# Altium PCB PCB2.PcbDoc
Units mil, origin at the board's own origin, x right, y up, seen from the top; angles counter-clockwise.
Board outline 6000 x 4000 mil, 4 copper layers (Top Layer, Layer 1, Layer 2, Bottom Layer), stack 23.756 mil thick; 26 components, 26 nets, 80 pads, 6 vias.
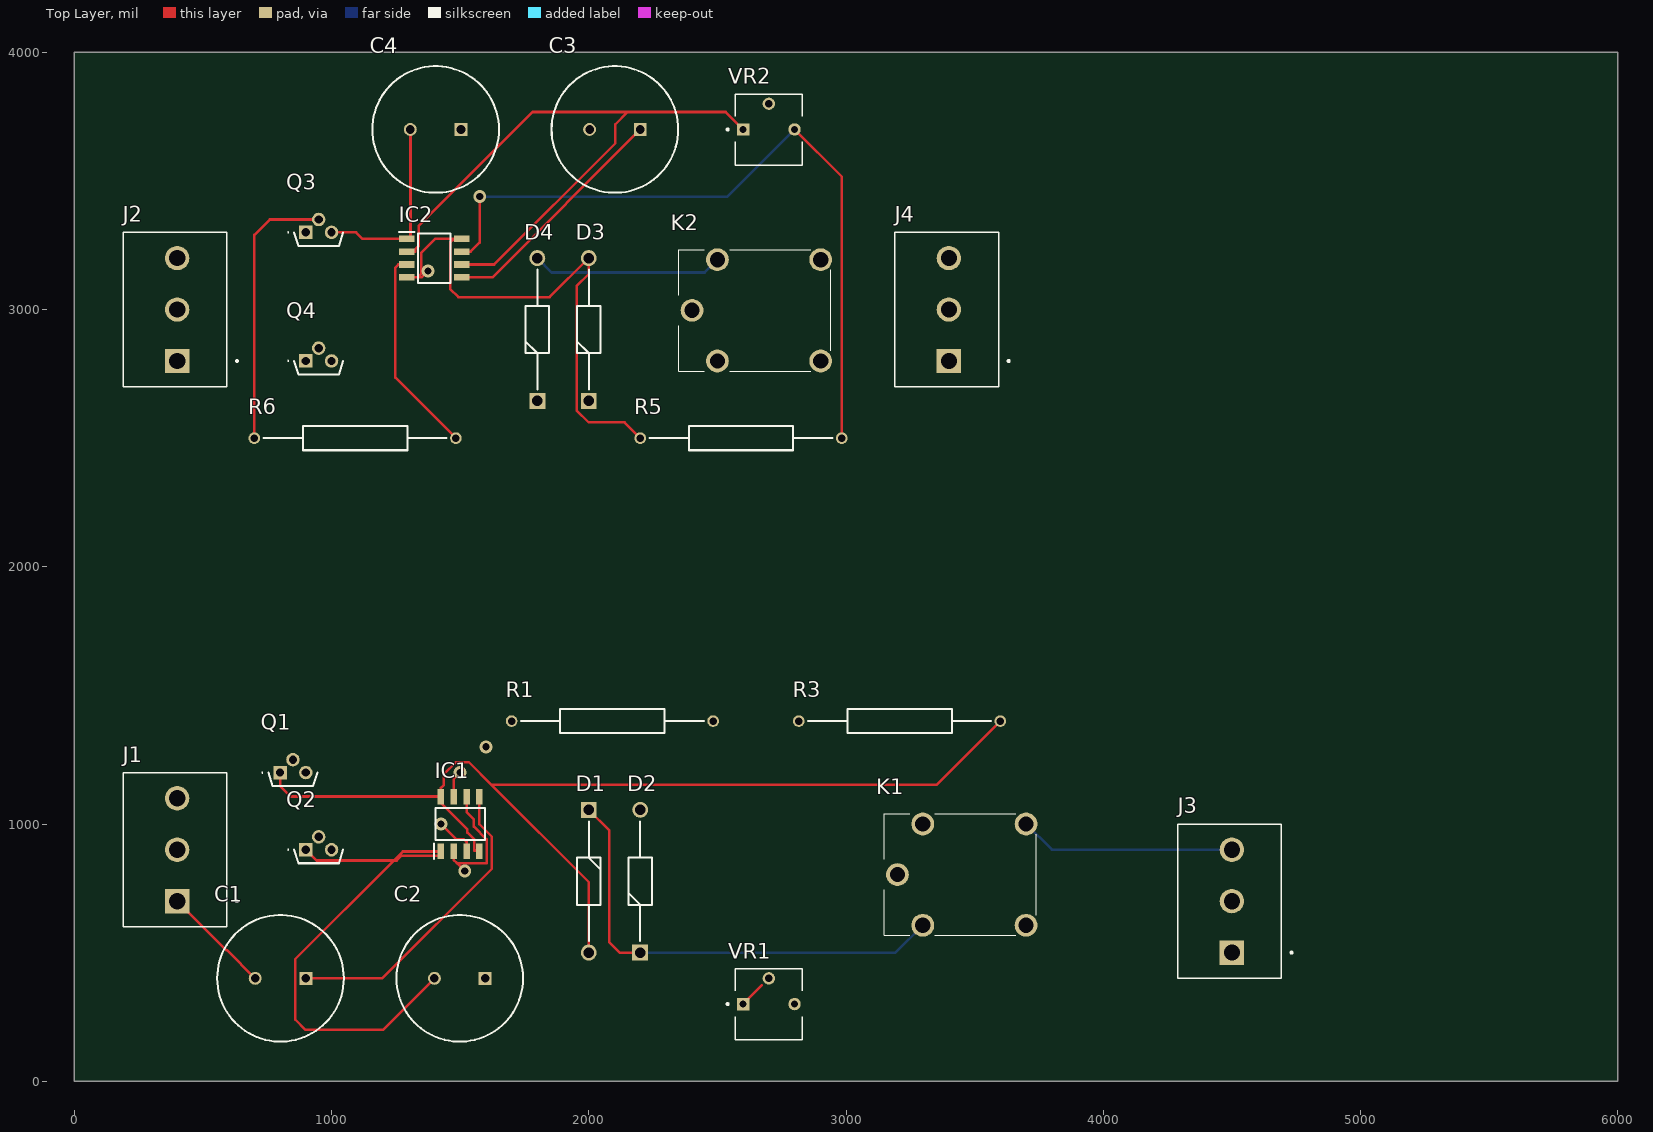
[diagram p0: Top Layer view]
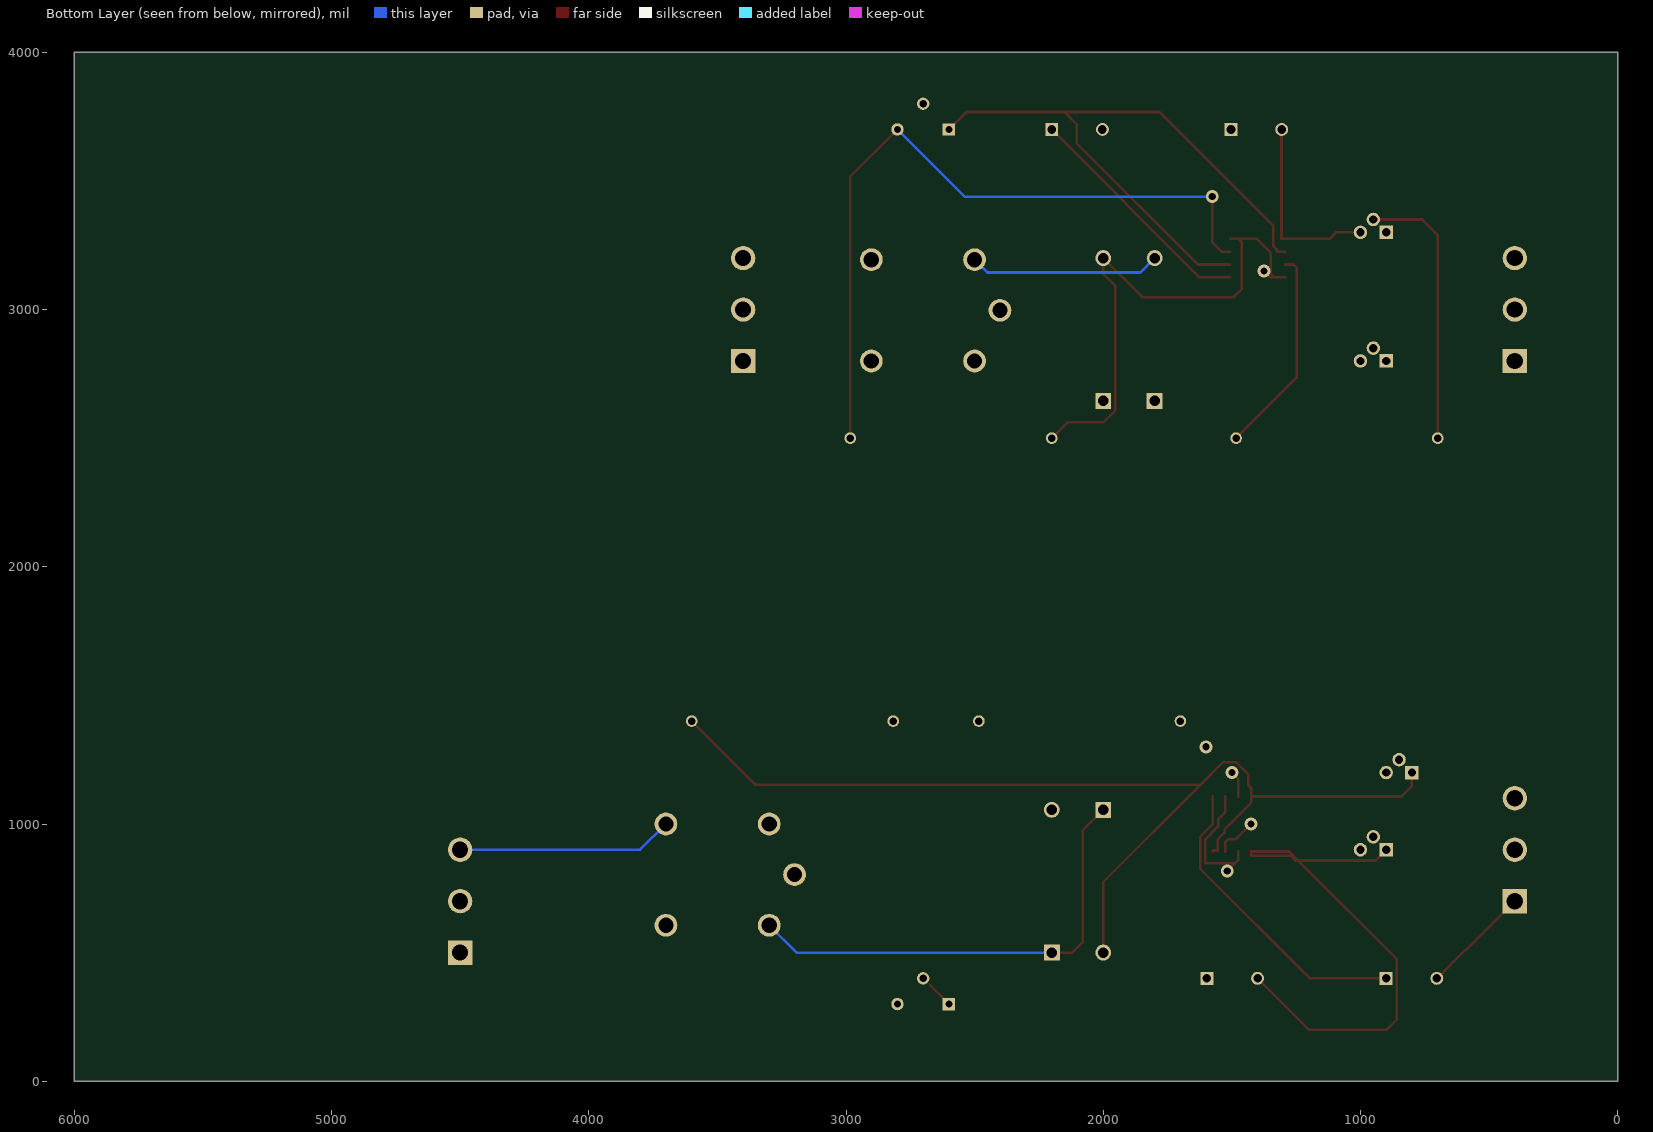
[diagram p1: Bottom Layer view, seen from below]
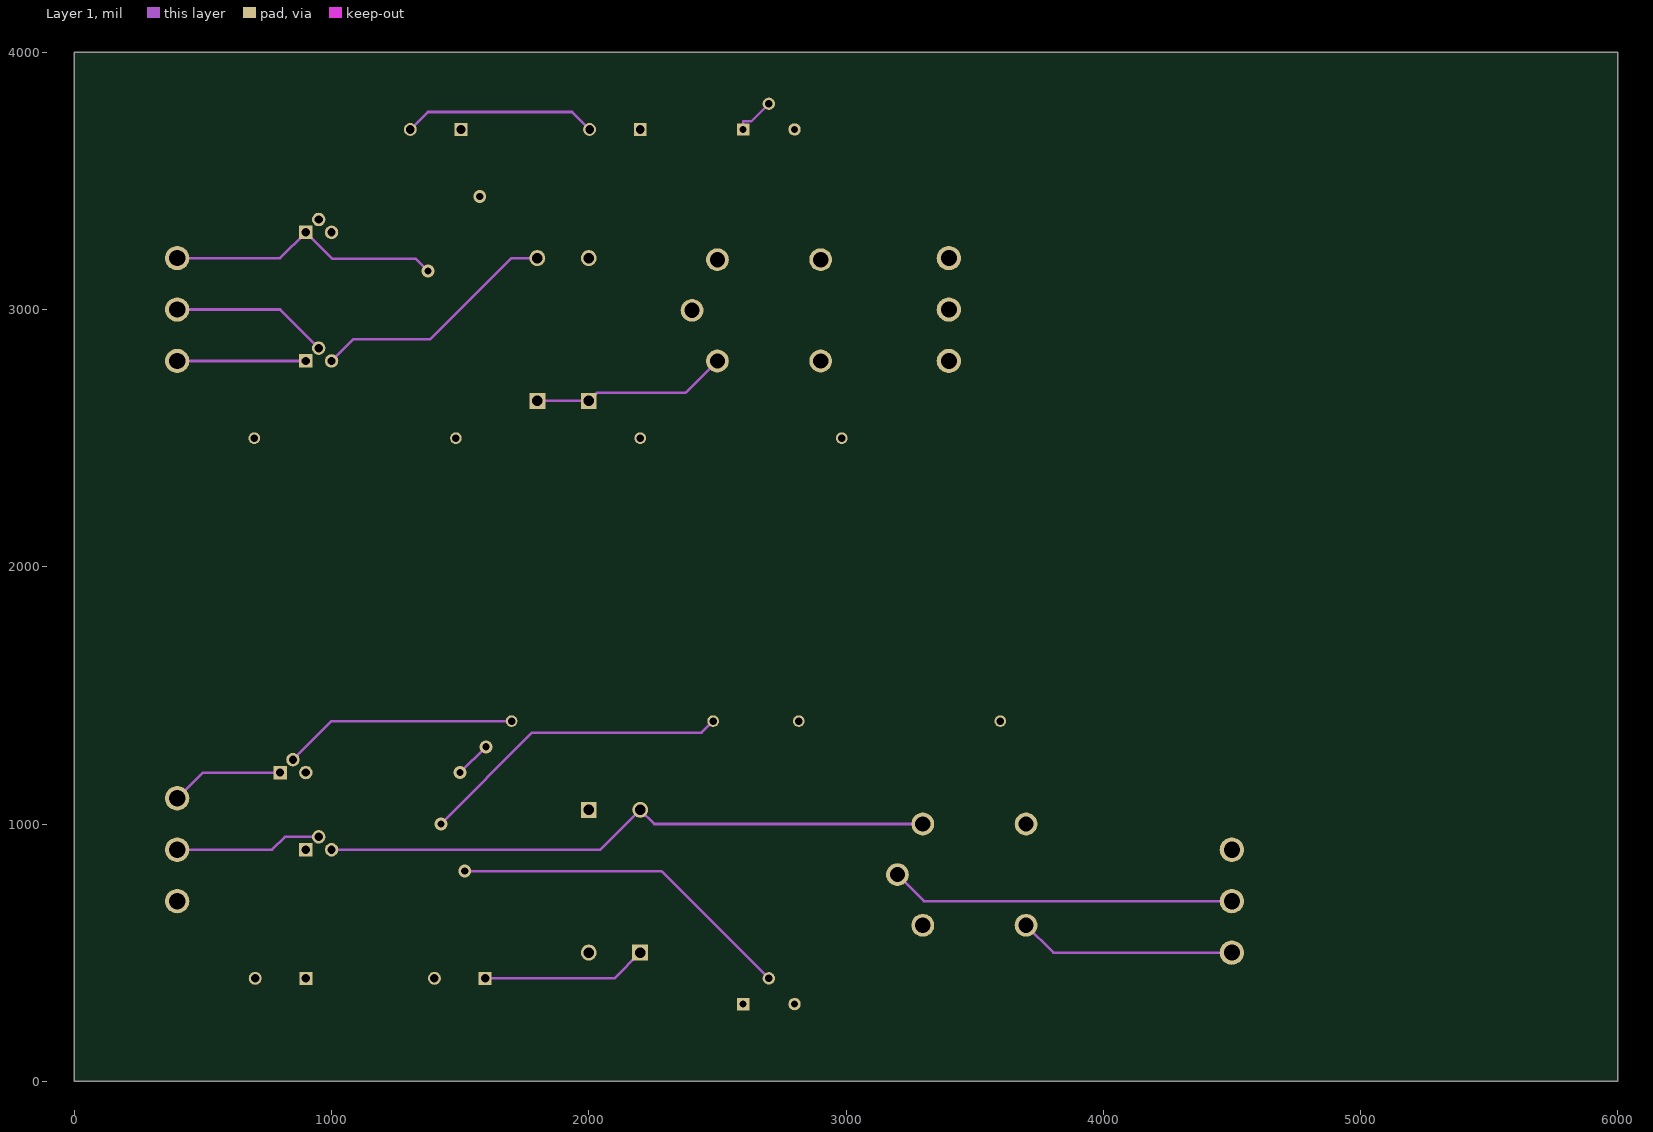
[diagram p2: Layer 1]
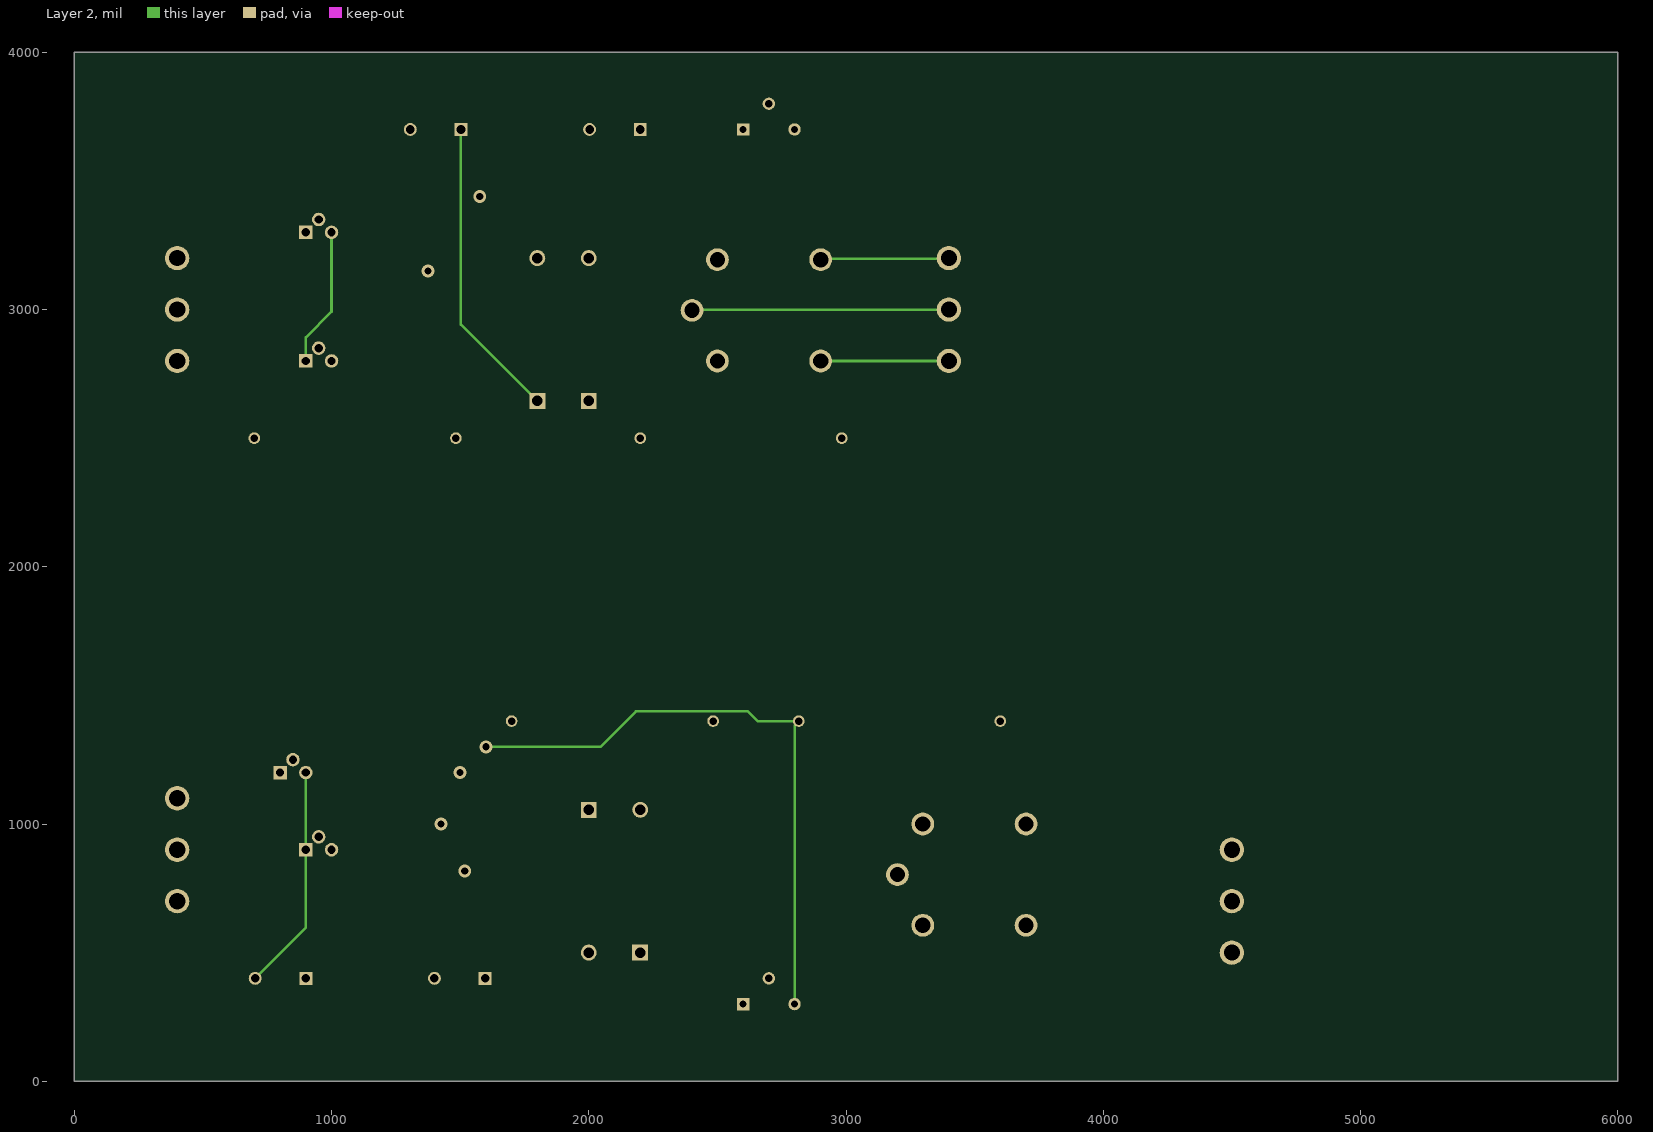
[diagram p3: Layer 2]
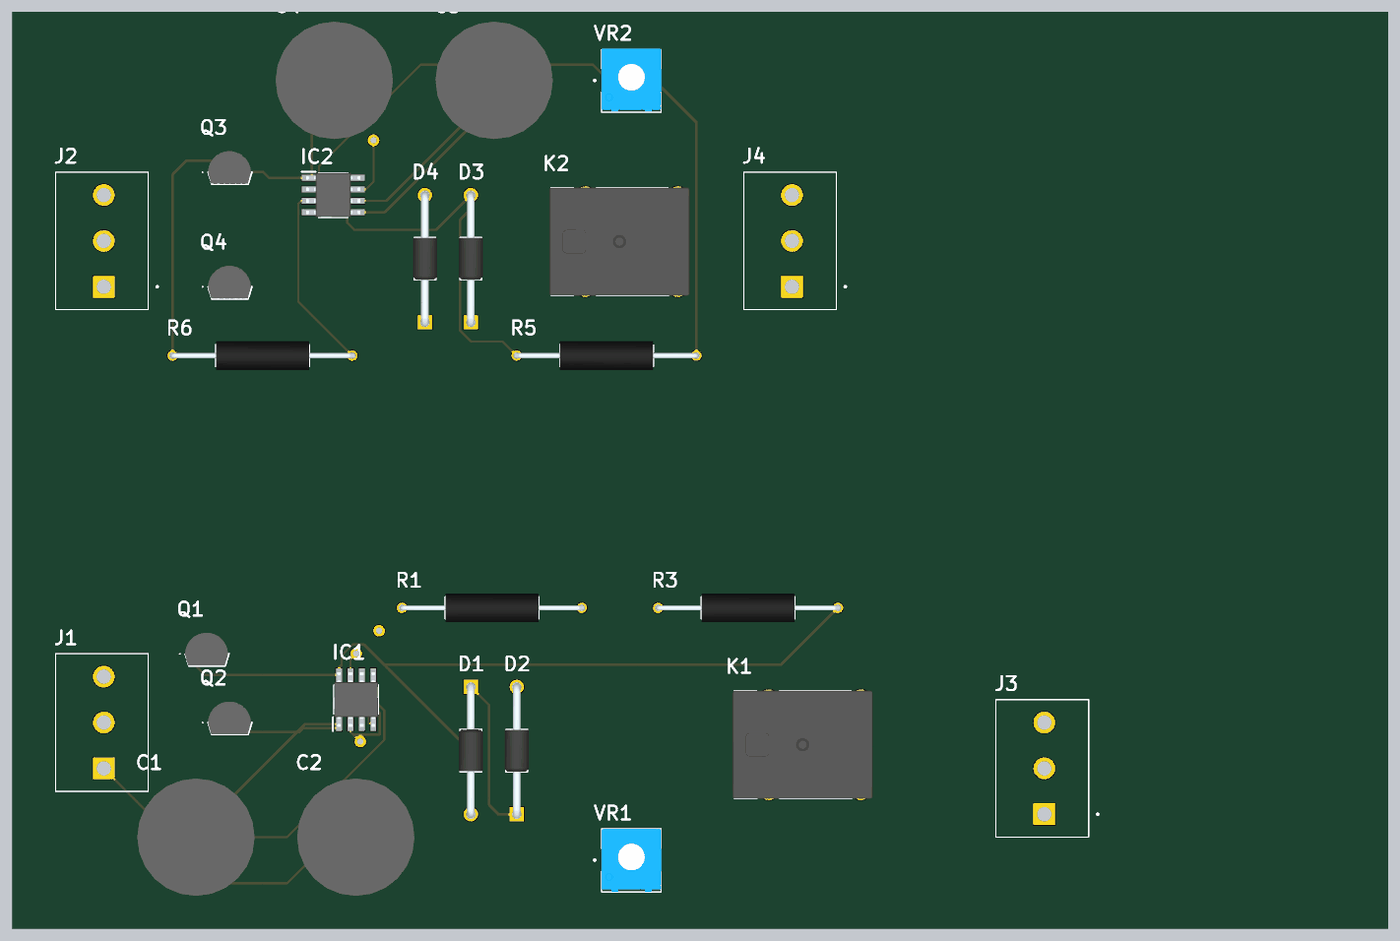
[diagram p4: 3D render of the assembled board from above, using the file's embedded part models]

## Layer stack, top to bottom
Top Solder: solder mask 0.4, Solder Resist, Dk 3.5
Top Layer: signal copper 1.4
Dielectric 2: prepreg 2.8, PP-006, Dk 4.1
Layer 1: signal copper 1.378
Dielectric 1: dielectric 12.6, FR-4, Dk 4.8
Layer 2: signal copper 1.378
Dielectric 3: prepreg 2.8, PP-006, Dk 4.1
Bottom Layer: signal copper 1.4
Bottom Solder: solder mask 0.4, Solder Resist, Dk 3.5

## Board outline
0,0 6000,0 6000,4000 0,4000

## Design rules (kind name [scope] priority, off if disabled: settings)
Clearance [All] p1: gap=10 ignorepadtopadclearanceinfootprint=FALSE except(0: Arc-Hole Track-Hole SMDPad-Hole THPad-Hole Via-Hole Fill-Hole Poly-Hole Region-Hole Text-Hole)
PolygonConnect [All] p1: connectstyle=Relief reliefconductorwidth=10 reliefentries=4 polygonreliefangle="90 Angle" airgapwidth=10
RoutingVias [All] p1: holewidth=28 width=50 viastyle="Through Hole" minholewidth=28 minwidth=50 maxholewidth=28 maxwidth=50
SolderMaskExpansion [All] p1: expansion=4 istentingtop=FALSE
Width [All] p1: maxlimit=10 minlimit=10 preferedwidth=10
30 further rules are at their usual default settings.

## Classes and differential pairs
component class Sheet2: C3 C4 D3 D4 IC2 J2 J4 K2 Q3 Q4 R5 R6 VR2

## Components (designator, comment, footprint, x,y, rotation, side; value= is the part's Value field where it differs from the comment)
C1 "100uf" CAPPRD500W65D1250H2700 900,400 r180 top
C2 "100uf" CAPPRD500W65D1250H2700 1596.85,400 r180 top
C3 "100uf" CAPPRD500W65D1250H2700 2200,3700 r180 top
C4 "100uf" CAPPRD500W65D1250H2700 1503.15,3700 r180 top
D1 "1N4007-E3_73" DIOAD1405W86L465D235 2000,1055.12 r270 top
D2 "1N4007-E3_73" DIOAD1405W86L465D235 2200,500 r90 top
D3 "1N4007-E3_73" DIOAD1405W86L465D235 2000,2644.88 r90 top
D4 "1N4007-E3_73" DIOAD1405W86L465D235 1800,2644.88 r90 top
IC1 "LM555CM" SOIC127P600X175-8N 1500,1000 r90 top
IC2 "LM555CM" SOIC127P600X175-8N 1400,3200 r0 top
J1 "TB007-508-03BE" CUI_TB007-508-03BE 400,700 r90 top
J2 "TB007-508-03BE" CUI_TB007-508-03BE 400,2800 r90 top
J3 "TB007-508-03BE" CUI_TB007-508-03BE 4500,500 r90 top
J4 "TB007-508-03BE" CUI_TB007-508-03BE 3400,2800 r90 top
K1 "JJM1-12V" JJM112V 3298.43,606.3 r0 top
K2 "JJM1-12V" JJM112V 2500,2800 r0 top
Q1 "2N4401_PBFREE" 2N4401PBFREE 800,1200 r0 top
Q2 "2N4401_PBFREE" 2N4401PBFREE 900,900 r0 top
Q3 "2N4401_PBFREE" 2N4401PBFREE 900,3300 r0 top
Q4 "2N4401_PBFREE" 2N4401PBFREE 900,2800 r0 top
R1 "1k" RESAD1987W56L1031D239 2483.46,1400 r180 top
R3 "1k" RESAD1987W56L1031D239 3600,1400 r180 top
R5 "1k" RESAD1987W56L1031D239 2200,2500 r0 top
R6 "1k" RESAD1987W56L1031D239 1483.46,2500 r180 top
VR1 "3362P-1-102RLF" TRIM_3362P-1-102RLF 2700,300 r0 top
VR2 "3362P-1-102RLF" TRIM_3362P-1-102RLF 2700,3700 r0 top

## Footprints (in the part's own frame and the unit in brackets; to place one, negate y for a bottom-side part, rotate by r counter-clockwise, add the part's x,y. Pads: shape width x height; smd on the part's side, far side on the other; paste and mask are expansions set on the pad)
2N4401PBFREE [mm]
  rect 1.333x1.333 hole 0.82: 1(0,0)
  round 1.333 hole 0.82: 2(1.27,1.27) 3(2.54,0)
  silkscreen extent -1.8,-1.34 3.68,0.05, body extent -1.17,-1.3 3.59,2.33, height 6.06
CAPPRD500W65D1250H2700 [mm]
  rect 1.275x1.275 hole 0.85: 1(0,0)
  round 1.275 hole 0.85: 2(5,0)
  silkscreen extent -3.75,-6.25 8.75,6.25, body extent -3.99,-6.5 9,6.5, height 27
CUI_TB007-508-03BE [mm]
  rect 2.4x2.4 / inner round 2.4 / far side rect 2.4x2.4 hole 1.6: 1(0,0)
  round 2.4 hole 1.6: 2(5.08,0) 3(10.16,0)
  silkscreen extent -2.54,-6 12.7,5.35
DIOAD1405W86L465D235 [mm]
  rect 1.575x1.575 hole 1.05: 1(0,0)
  round 1.575 hole 1.05: 2(14.1,0)
  silkscreen extent 1.14,-1.18 12.96,1.18, body extent -0.43,-1.34 14.48,1.34, height 2.7
JJM112V [mm]
  round 2.25 hole 1.5: 1(0,0) 2(10.2,0) 3(10.2,10) 4(0,10) 5(-2.5,5)
  silkscreen extent -3.8,-1 11.2,11, body extent -3.99,-1 11.51,11, height 12.82
RESAD1987W56L1031D239 [mm]
  round 1.15 hole 0.75: 1(0,0) 2(19.9,0)
  silkscreen extent 0.92,-1.2 18.97,1.2, body extent -0.28,-1.58 20.15,1.58, height 3.18
SOIC127P600X175-8N [mm]
  rect 1.525x0.65 smd: 1(-2.712,1.905) 2(-2.712,0.635) 3(-2.712,-0.635) 4(-2.712,-1.905) 5(2.712,-1.905) 6(2.712,-0.635) 7(2.712,0.635) 8(2.712,1.905)
  silkscreen extent -3.47,-2.45 1.6,2.58, body extent -3,-2.45 3,2.45, height 1.75
TRIM_3362P-1-102RLF [mil]
  rect 48.11x48.11 hole 28.11: 1(-100,0)
  round 48.11 hole 28.11: 2(0,100) 3(100,0)
  silkscreen extent -164,-139 130,137, body extent -130,-138 130,138, height 192

## Part data
C1 C2 C3 C4: library part EEUTA1E102LB, "Capacitor Polarised", Manufacturer_Name=Panasonic, Datasheet Link=http://industrial.panasonic.com/cdbs/www-data/pdf/RDF0000/ABA0000C1212.pdf, Height=27mm, Manufacturer_Part_Number=EEUTA1E102LB
D1 D2 D3 D4: "Diode", Arrow Part Number=1N4007-E3/73, Manufacturer_Name=Vishay, Mouser Part Number=625-1N4007-E3/73, Arrow Price/Stock=https://www.arrow.com/en/products/1n4007-e373/vishay?region=europe, Datasheet Link=https://mouser.componentsearchengine.com/Datasheets/2/1N4007-E3_73.pdf, Manufacturer_Part_Number=1N4007-E3/73, Mouser Price/Stock=https://www.mouser.co.uk/ProductDetail/Vishay-General-Semiconductor/1N4007-E3-73?qs=N4vtoAxH%2FSqT3Ng3e4K0Gw%3D%3D
IC1 IC2: "Integrated Circuit", Manufacturer_Name=onsemi, Mouser Part Number=512-LM555CM, Arrow Part Number=LM555CM, Arrow Price/Stock=https://www.arrow.com/en/products/lm555cm/on-semiconductor, Datasheet Link=https://datasheet.datasheetarchive.com/originals/distributors/Datasheets_SAMA/3a16823a9a49147dced1d21a4d0c2297.pdf, Height=1.75mm, Manufacturer_Part_Number=LM555CM, Mouser Price/Stock=https://www.mouser.co.uk/ProductDetail/onsemi-Fairchild/LM555CM?qs=4YdYnegEbZVLxPa60axfTg%3D%3D
J1 J2 J3 J4: Package=None, Availability=Unavailable, MP=TB007-508-03BE, Price=None
K1 K2: "Relay or Contactor", Manufacturer_Name=Panasonic, Mouser Part Number=769-JJM1-12V, Arrow Part Number=JJM1-12V, Arrow Price/Stock=https://www.arrow.com/en/products/jjm1-12v/panasonic?region=nac, Datasheet Link=https://www.panasonic-electric-works.com/cps/rde/xbcr/pew_eu_en/ds_61210_en_jjm.pdf, Height=14.2mm, Manufacturer_Part_Number=JJM1-12V, Mouser Price/Stock=https://www.mouser.co.uk/ProductDetail/Panasonic-Industrial-Devices/JJM1-12V?qs=UO%2Fx91QLkSB08I34A9%2FECg%3D%3D
Q1 Q2 Q3 Q4: "Transistor BJT NPN", Arrow Part Number="2N4401 PBFREE", Manufacturer_Name="Central Semiconductor", Mouser Part Number=610-2N4401, Arrow Price/Stock=https://www.arrow.com/en/products/2n4401-pbfree/central-semiconductor?region=nac, Datasheet Link=https://my.centralsemi.com/datasheets/2N4400.PDF, Height=5.33mm, Manufacturer_Part_Number="2N4401 PBFREE", Mouser Price/Stock=https://www.mouser.co.uk/ProductDetail/Central-Semiconductor/2N4401-PBFREE?qs=u16ybLDytRbENLVWEhN70w%3D%3D
R1 R3 R5 R6: library part RS01A1R000FE12, "Resistor", Manufacturer_Name=Vishay, Mouser Part Number=71-RS01A1R000FE12, Arrow Part Number=RS01A1R000FE12, Arrow Price/Stock=https://www.arrow.com/en/products/rs01a1r000fe12/vishay?region=nac, Datasheet Link=http://www.mouser.com/ds/2/427/rsns-226497.pdf, Manufacturer_Part_Number=RS01A1R000FE12, Mouser Price/Stock=https://www.mouser.co.uk/ProductDetail/Vishay-Dale/RS01A1R000FE12?qs=pX8%252BLszEE6SqU%2F4VU%252B6gEw%3D%3D
VR1 VR2: "1 kOhms 0.5W, 1/2W PC Pins Through Hole Trimmer Potentiometer Cermet 1 Turn Top Adjustment", Package="3362P-1 Bourns Inc.", Availability=Good, Check_prices=https://www.snapeda.com/parts/3362P-1-102RLF/Bourns/view-part/1439351/?ref=eda, MF=Bourns, MP=3362P-1-102RLF, Price=None, Purchase-URL=https://pricing.snapeda.com/search/part/3362P-1-102RLF/?ref=eda, SnapEDA_Link=https://www.snapeda.com/parts/3362P-1-102RLF/Bourns/view-part/1439351/?ref=snap

## Via types
v1: diameter 50, hole 28, Top Layer to Bottom Layer, 6 vias

## Nets (pads, with @x,y where several pads share a name; then routed paths per layer and width w, separated by ;. In a path a pad name is that pad's centre, name@x,y a point inside that pad or via, vN(x,y) a via of type N, cw(c..) or ccw(c..) an arc to the next point about the centre after c; other vN are vias at no path point)
NetC1_1: C1.1 IC1.5 | length 1199.9
  Top Layer w10: C1.1 1197,400 1622.8,825.8 1622.8,951.2 1575,999 IC1.5
NetC1_2: C1.2 C2.2 IC1.1 J1.1 Q1.3 Q2.1 | length 3490.6
  Top Layer w10: J1.1 590,510 593.15,510 C1.2 ; Q2.1 942,858 1242,858 ; C2.2 1200,200 899,200 859,240 859,475 1242,858 ; IC1.1 IC1.1@1425,893 ; 1242,858 1277,893 IC1.1@1425,893 ; 1242,858 1253,858 1271,876 1425,876 IC1.1@1425,893
  Layer 2 w10: C1.2 900,596.85 Q2.1 Q1.3
NetC2_1: C2.1 D1.1 D2.1 K1.1 | length 2471.9
  Top Layer w10: D1.1 2080,975.12 2080,540 2120,500 D2.1
  Layer 1 w10: C2.1 2100,400 D2.1
  Bottom Layer w10: D2.1 3192.13,500 K1.1
NetC3_1: C3.1 IC2.5 | length 931.4
  Top Layer w10: IC2.5 1625,3125 C3.1
NetC3_2: C3.2 C4.2 IC2.1 J2.1 Q3.3 Q4.1 | length 2537.2
  Top Layer w10: Q3.3 1095,3300 1120,3275 IC2.1 1307,3275 1307,3699.3 C4.2
  Layer 1 w10: J2.1 Q4.1 ; C4.2 1374.3,3768 1935.15,3768 C3.2
  Layer 2 w10: Q4.1 900,2892 1000,2992 Q3.3
NetC4_1: C4.1 D3.1 D4.1 K2.1 | length 1942.3
  Layer 1 w10: D4.1 D3.1 2031.12,2676 2376,2676 K2.1
  Layer 2 w10: C4.1 1503.15,2941.73 D4.1
NetD1_2: D1.2 IC1.4 IC1.8 J1.3 Q1.1 R3.1 | length 4645.1
  Top Layer w10: Q1.1 800,1147 840,1107 IC1.8@1425,1107 ; IC1.4 1575,896.91 1555,896.91 1555,939.43 1528.12,966.31 1528.12,978.88 1425,1082 IC1.8 IC1.8@1425,1107 ; D1.2 2000,774 1622,1152 ; R3.1 3352,1152 1622,1152 ; IC1.8@1425,1107 1425,1140 1437,1152 1437,1193.57 1483.43,1240 1534,1240 1622,1152
  Layer 1 w10: J1.3 500,1200 Q1.1
NetD2_2: D2.2 K1.4 Q2.3 | length 2385.5
  Layer 1 w10: Q2.3 2044.88,900 D2.2 2255.12,1000 K1.4
NetD3_2: D3.2 IC2.4 IC2.8 J2.3 Q3.1 R5.1 | length 3172.6
  Top Layer w10: IC2.4 1334,3125 ; v1(1375,3150) 1350,3125 1334,3125 ; IC2.8 1476,3275 ; R5.1 2139,2561 2000,2561 1953,2608 1953,3092 2000,3139 D3.2 1848,3048 1493,3048 1461,3080 1461,3260 1476,3275 ; 1334,3125 1349,3140 1349,3150 1349,3220.94 1403.06,3275 1476,3275
  Layer 1 w10: J2.3 800,3200 Q3.1 1002,3198 1327,3198 v1(1375,3150)
NetD4_2: D4.2 K2.4 Q4.3 | length 1709.5
  Layer 1 w10: Q4.3 1085,2885 1384,2885 1699,3200 D4.2
  Bottom Layer w10: D4.2 1856,3144 2450.3,3144 K2.4
NetIC1_2: IC1.2 IC1.6 VR1.2 | length 1855.6
  Top Layer w10: IC1.2 1475,860 1487,848 ; v1(1518,817) 1487,848 ; IC1.6 1525,1046 1553,1018 1553,990 1602.8,940.2 1602.8,848 1487,848
  Layer 1 w10: v1(1518,817) 2283,817 VR1.2
NetIC1_3: IC1.3 R1.1 | length 1389.9
  Top Layer w10: v1(1425,1000) 1484,941 1514,941 1525,930 IC1.3
  Layer 1 w10: v1(1425,1000) 1780,1355 2438.46,1355 R1.1
NetIC1_7: IC1.7 R3.2 VR1.3 | length 2641
  Top Layer w10: IC1.7 1475,1175 v1(1500,1200)
  Layer 1 w10: v1(1500,1200) v1(1600,1300)
  Layer 2 w10: v1(1600,1300) 2045.9,1300 2183.54,1437.64 2618.61,1437.64 2656.25,1400 R3.2 2800,1383.46 VR1.3
NetIC2_2: IC2.2 IC2.6 VR2.1 VR2.2 | length 2703.6
  Top Layer w10: IC2.2 1325,3225 1325,3233.75 1338.25,3247 1338.25,3324.25 1782,3768 2151,3768 ; IC2.6 1632,3175 2103,3646 2103,3720 2151,3768 ; VR2.1 2532,3768 2151,3768
  Layer 1 w10: VR2.1 2600,3732 2632,3732 VR2.2
NetIC2_3: IC2.3 R6.1 | length 810.7
  Top Layer w10: IC2.3 1260,3175 1248,3163 1248,2735.46 R6.1
NetIC2_7: IC2.7 R5.2 VR2.3 | length 2870.8
  Top Layer w10: IC2.7 1541,3225 1576,3260 v1(1576,3439) ; VR2.3 2983.46,3516.54 R5.2
  Bottom Layer w10: v1(1576,3439) 2539,3439 VR2.3
NetJ1_2: J1.2 Q2.2 | length 570.7
  Layer 1 w10: J1.2 769,900 819,950 Q2.2
NetJ2_2: J2.2 Q4.2 | length 612.1
  Layer 1 w10: J2.2 800,3000 Q4.2
NetJ3_1: J3.1 K1.2 | length 844
  Layer 1 w10: K1.2 3806.3,500 J3.1
NetJ3_2: J3.2 K1.5 | length 1342.7
  Layer 1 w10: K1.5 3303.15,700 J3.2
NetJ3_3: J3.3 K1.3 | length 841.4
  Bottom Layer w10: K1.3 3800,900 J3.3
NetJ4_1: J4.1 K2.2 | length 498.4
  Layer 2 w10: K2.2 J4.1
NetJ4_2: J4.2 K2.5 | length 999.7
  Layer 2 w10: K2.5 2403.15,2998.43 3398.43,2998.43 J4.2
NetJ4_3: J4.3 K2.3 | length 501
  Layer 2 w10: K2.3 2904.72,3196.85 3396.85,3196.85 J4.3
NetQ1_2: Q1.2 R1.2 | length 912.1
  Layer 1 w10: Q1.2 1000,1400 R1.2
NetQ3_2: Q3.2 R6.2 | length 1064.9
  Top Layer w10: R6.2 700,3290 760,3350 Q3.2
pads on no net: VR1.1
copper on no net: | length 102.4
  Top Layer w10: 2600,300 2672.38,372.38